# EAGLE board eib-256_panel (EAGLE 6.5.0), part 1 of 18
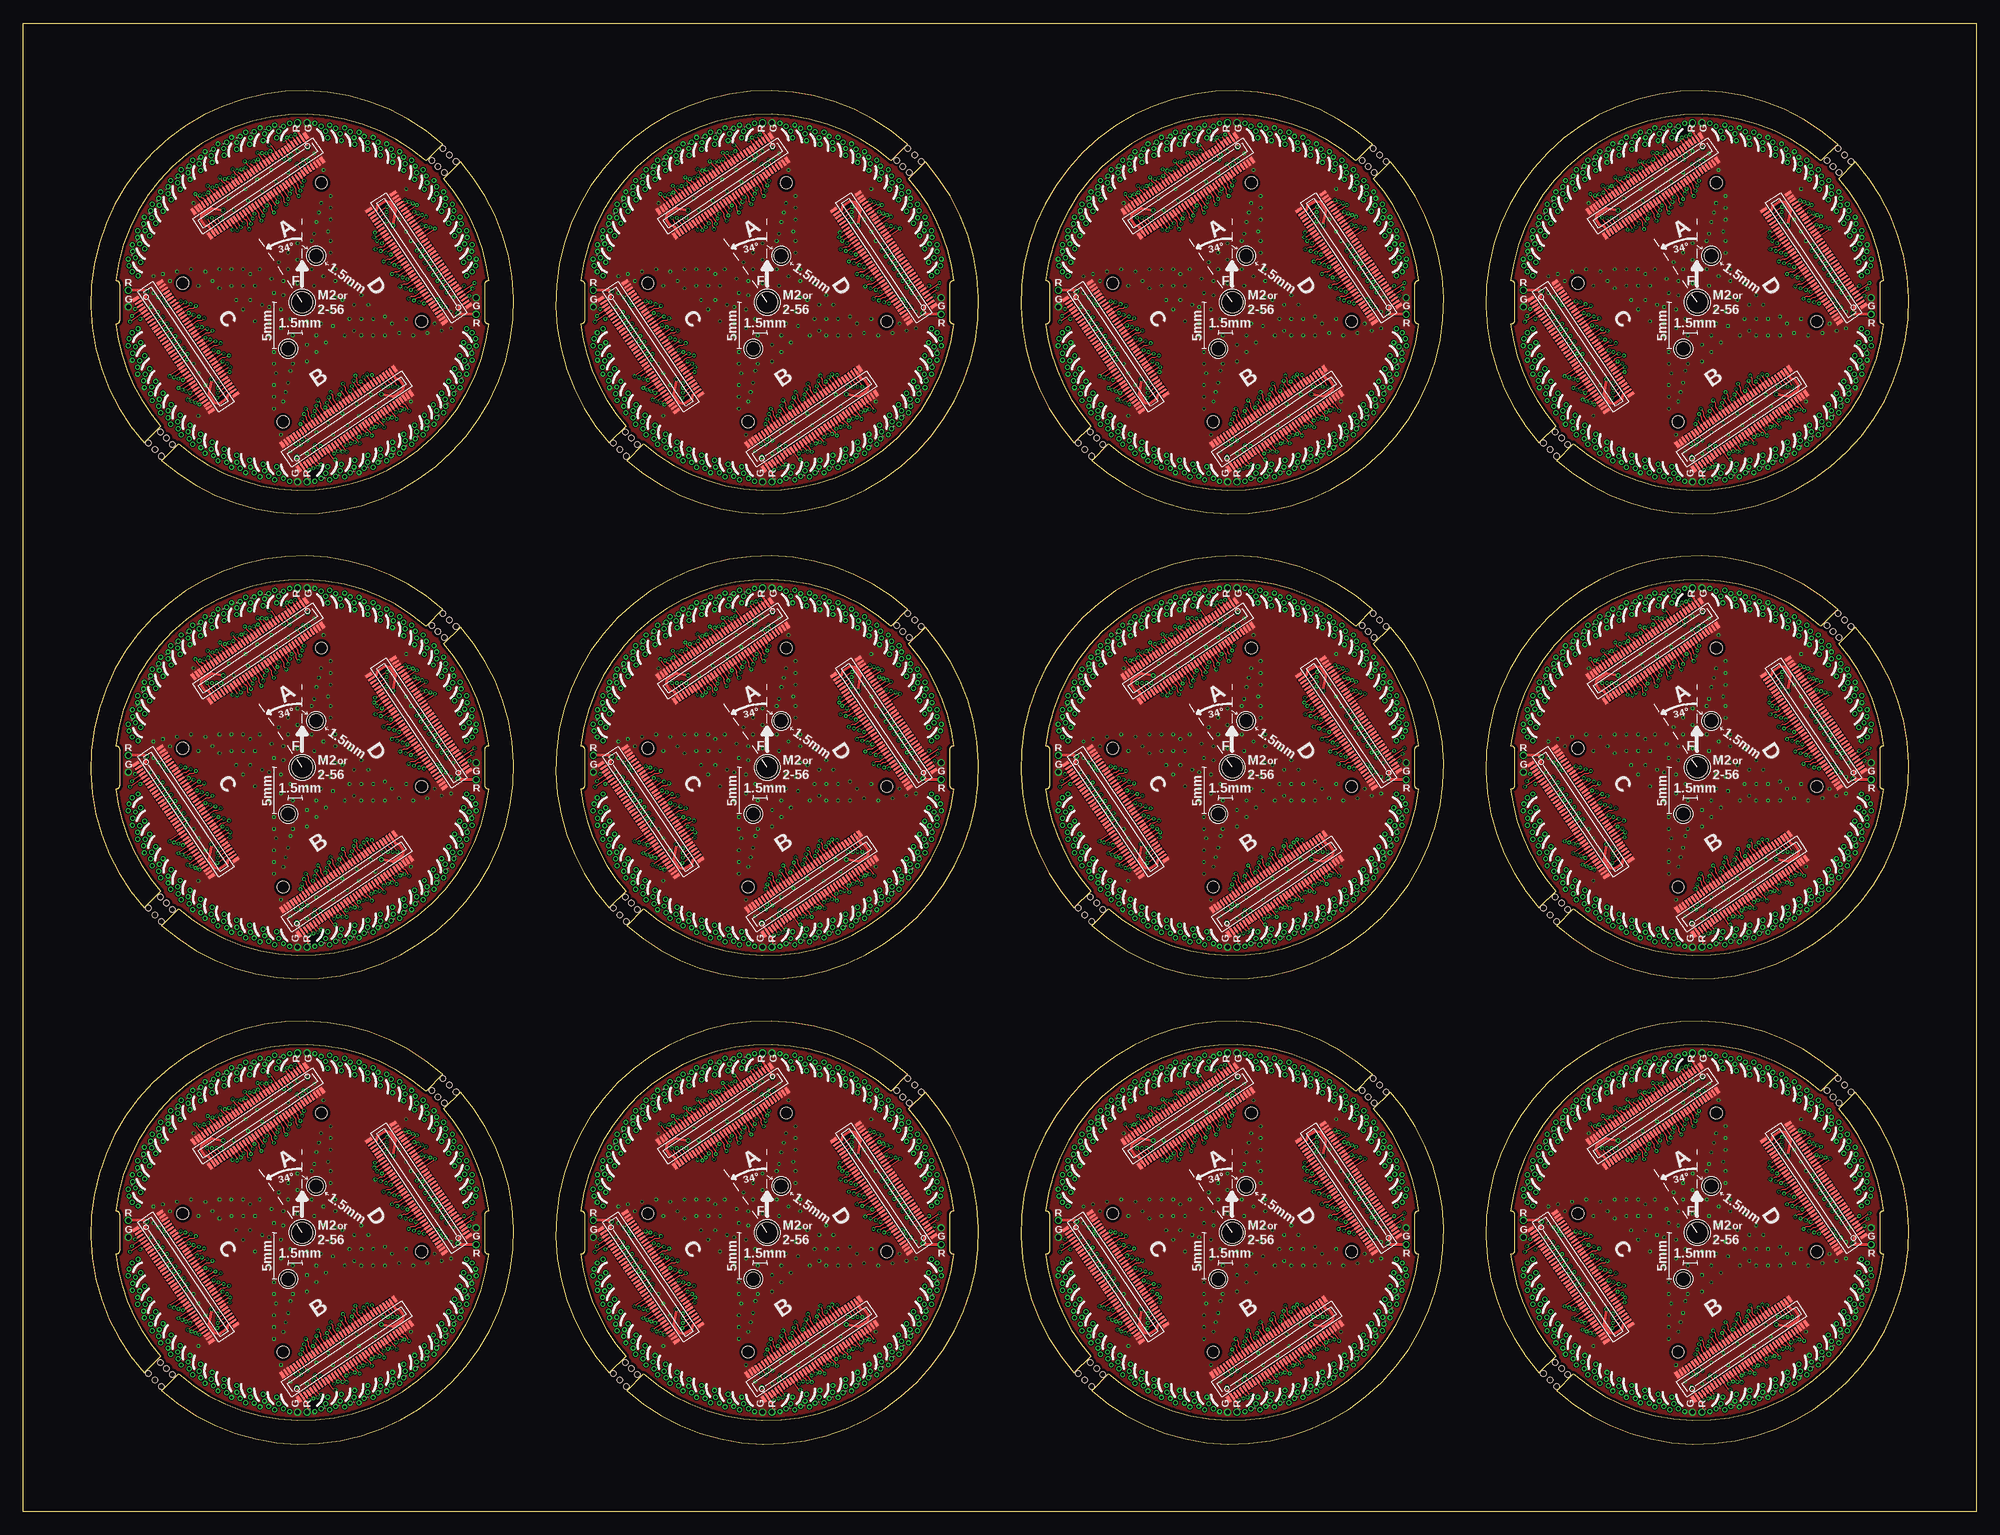
[diagram p0: board, top side]
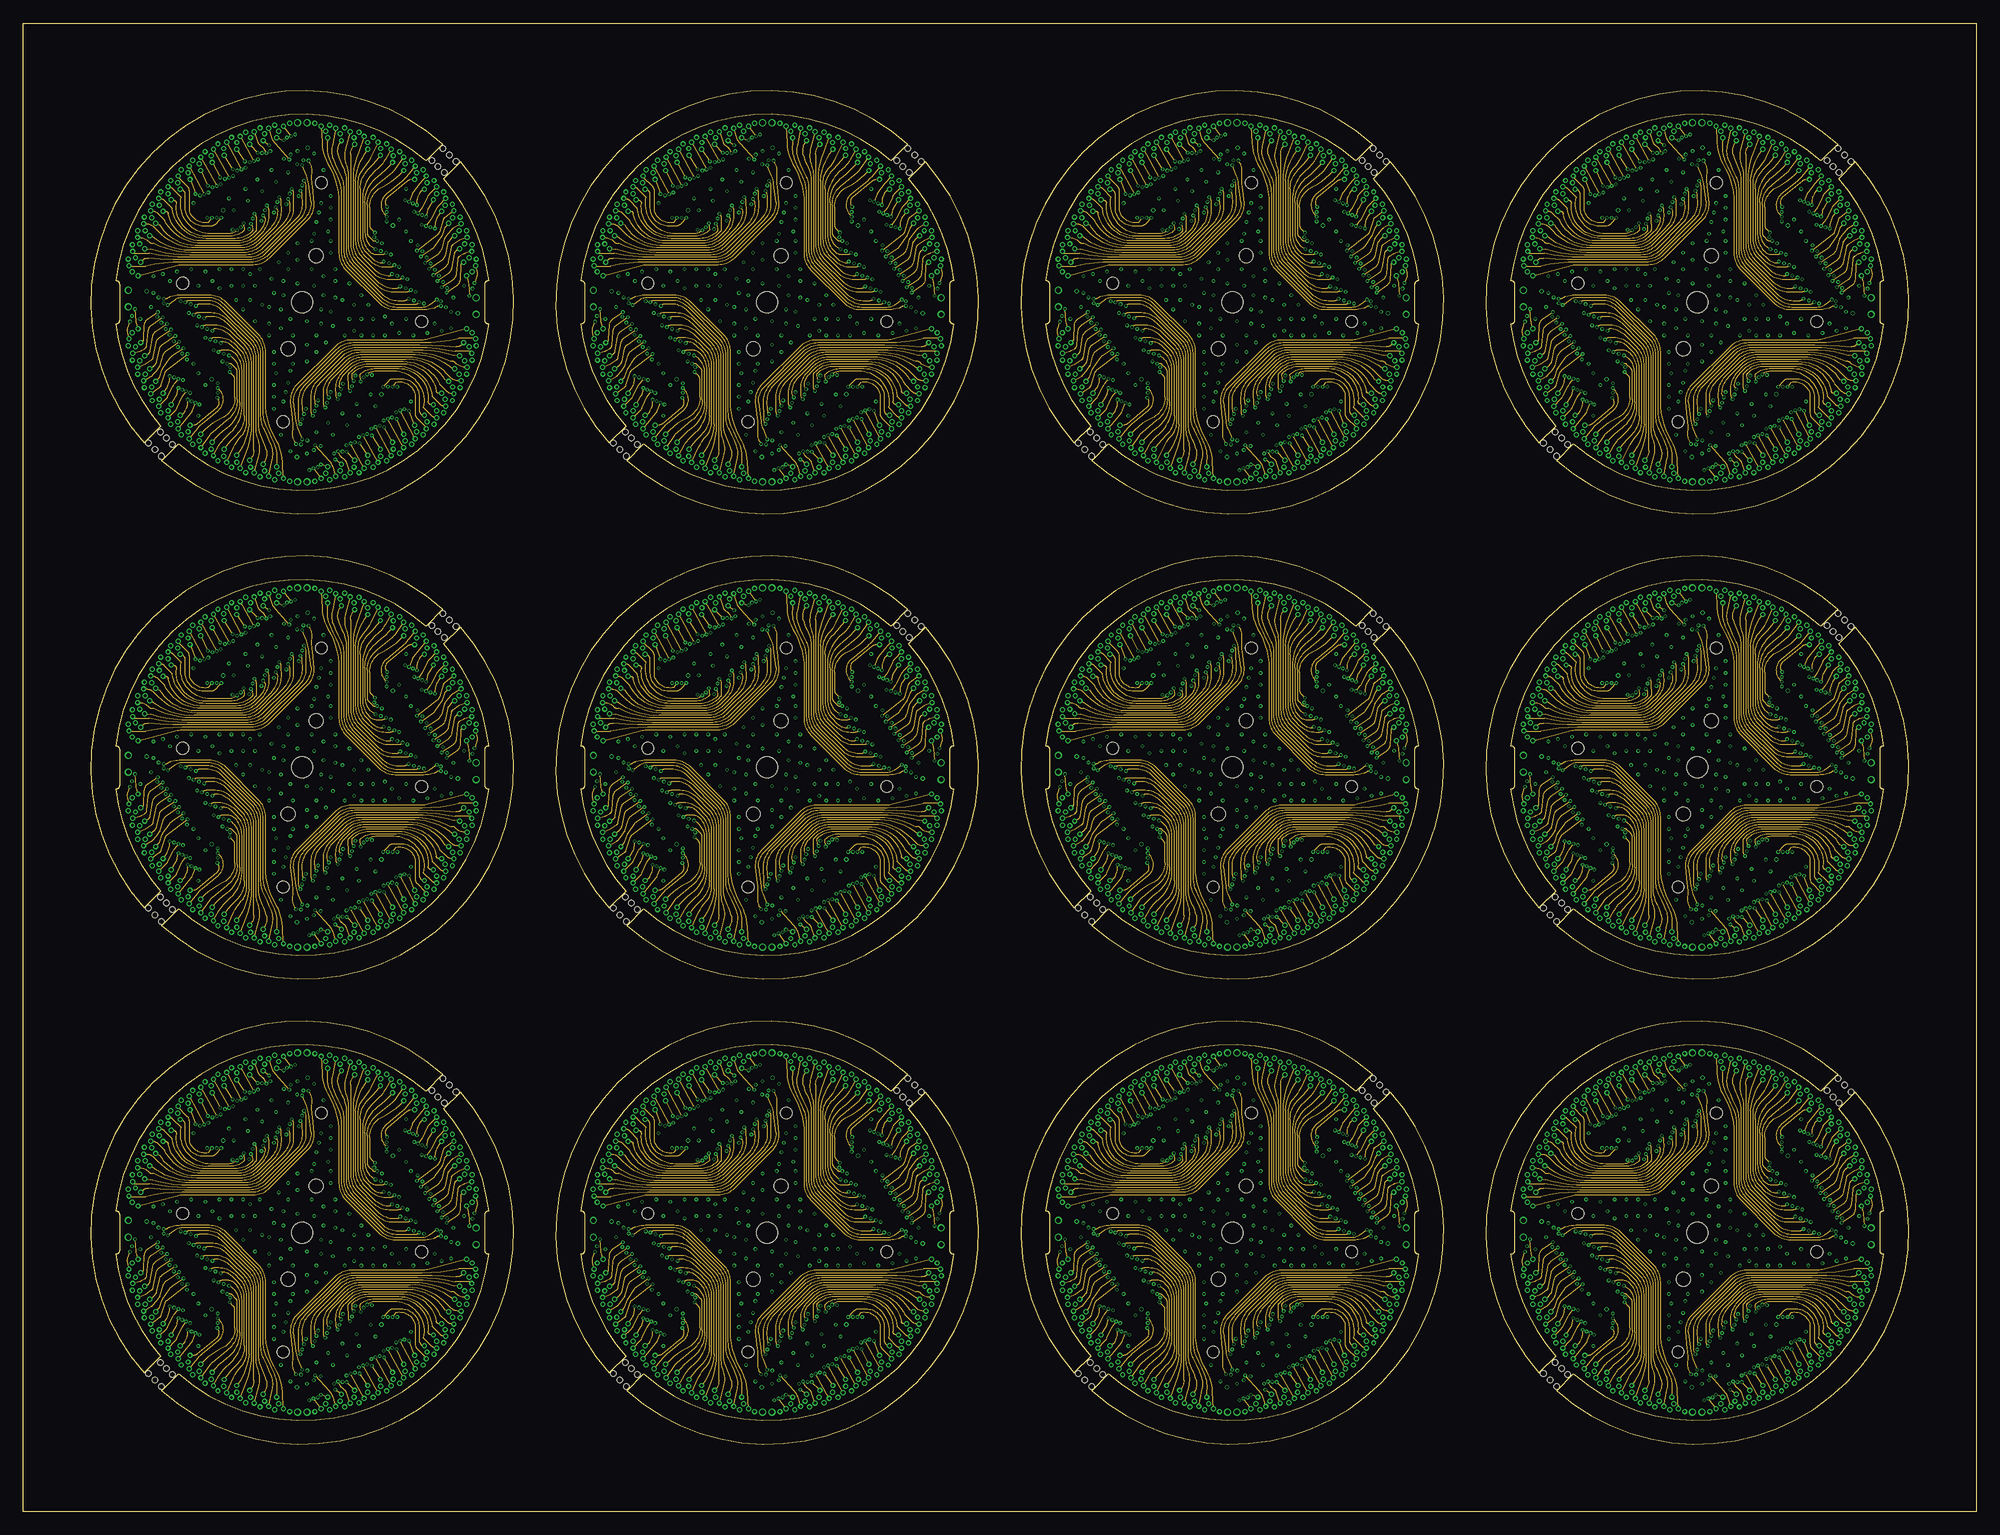
[diagram p1: board, inner layer Route2]
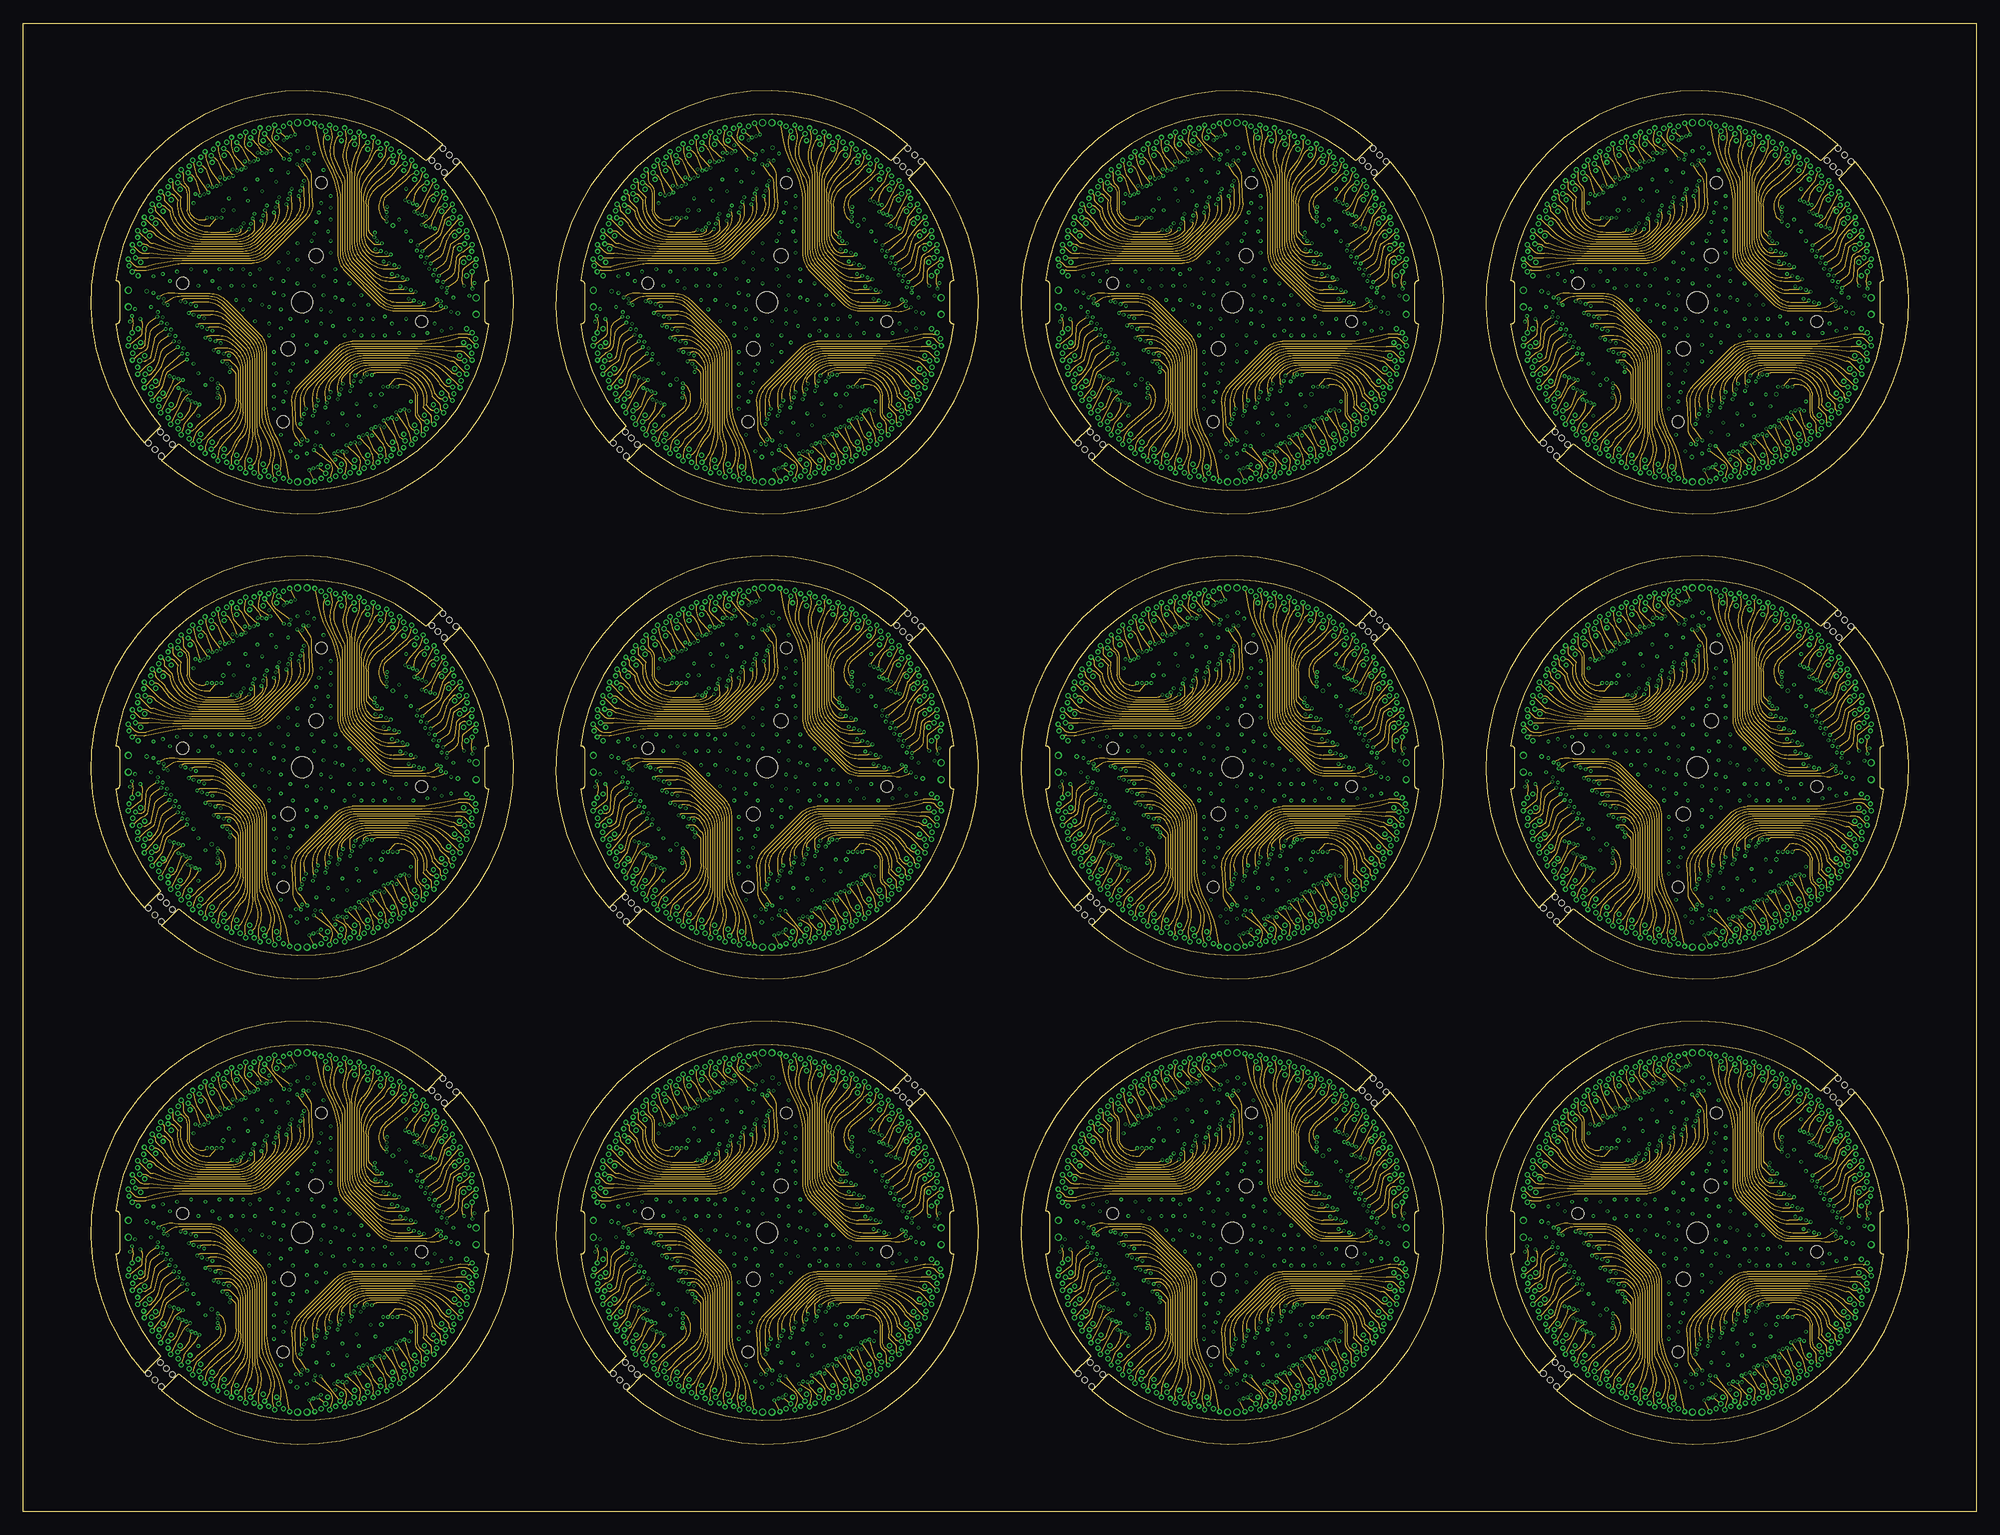
[diagram p2: board, inner layer Route15]
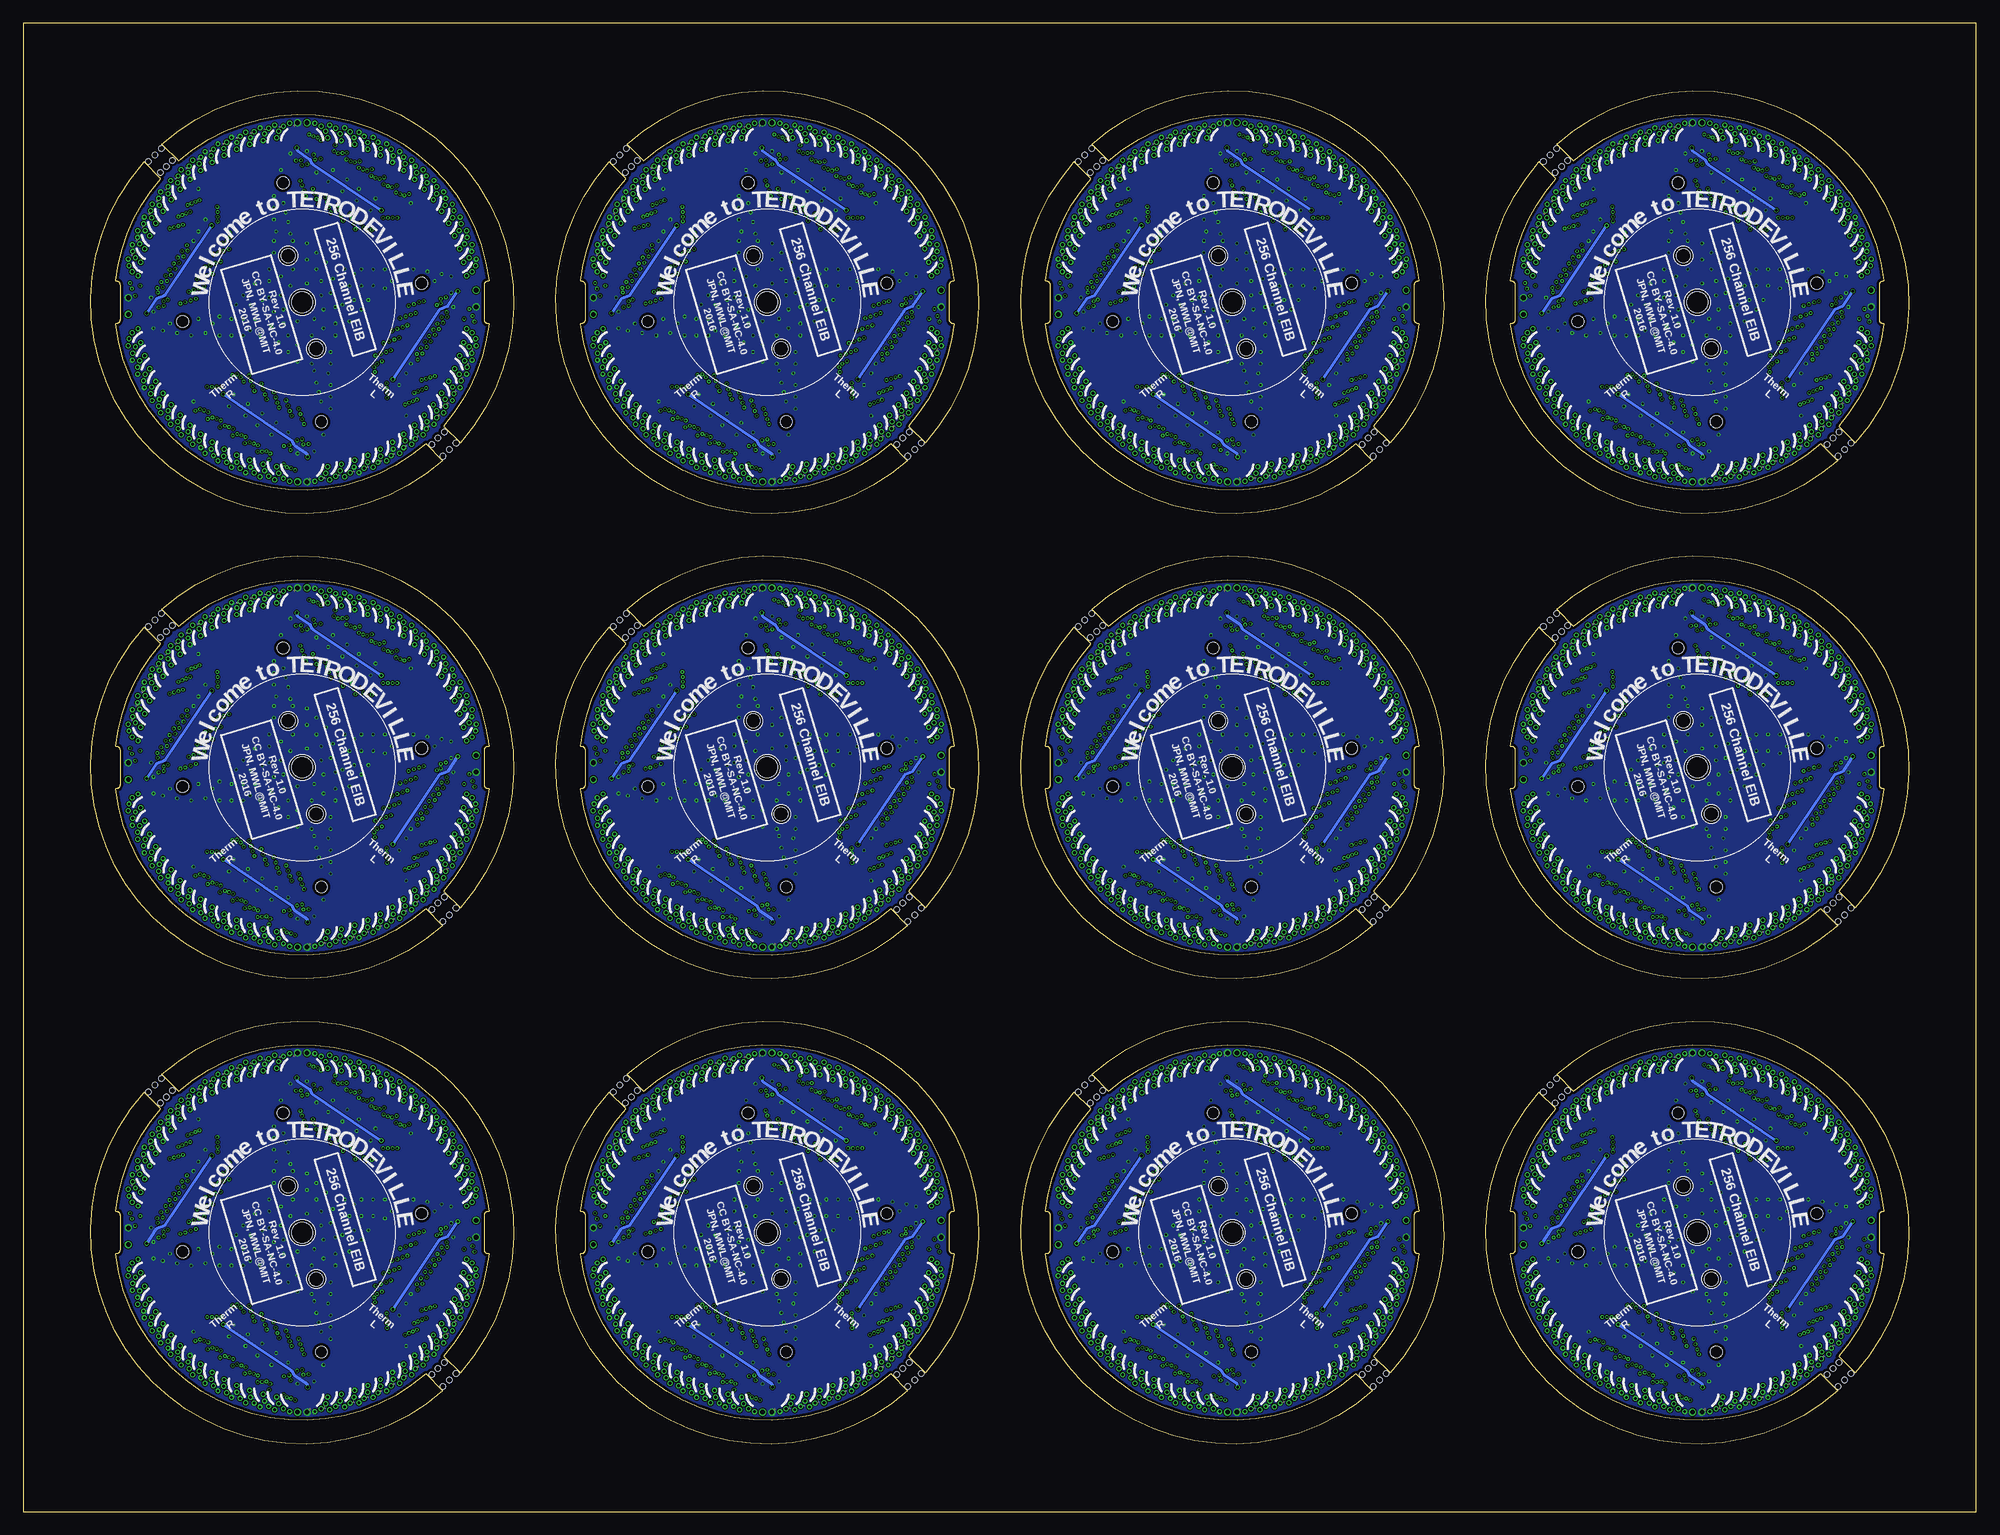
[diagram p3: board, bottom side, seen from below]

Size 210 x 160 mm. Coordinates in mm from the lower left corner, seen from the top.
Outline: 45.1,47.01 arc173 12.99,14.9
Outline: 45.1,47.01 arc173 12.99,14.9
Outline: 12.99,14.9 14.8,16.7 arc-35 9.93,27.7 10,27.7 arc90 10.4,28.1 10.4,31.9 arc90 10,32.3 9.93,32.3 arc-125 43.3,45.2 45.1,47.01
Outline: 95.1,47.01 arc173 62.99,14.9
Outline: 95.1,47.01 arc173 62.99,14.9
Outline: 62.99,14.9 64.8,16.7 arc-35 59.93,27.7 60,27.7 arc90 60.4,28.1 60.4,31.9 arc90 60,32.3 59.93,32.3 arc-125 93.3,45.2 95.1,47.01
Outline: 145.1,47.01 arc173 112.99,14.9
Outline: 145.1,47.01 arc173 112.99,14.9
Outline: 112.99,14.9 114.8,16.7 arc-35 109.93,27.7 110,27.7 arc90 110.4,28.1 110.4,31.9 arc90 110,32.3 109.93,32.3 arc-125 143.3,45.2 145.1,47.01
Outline: 195.1,47.01 arc173 162.99,14.9
Outline: 195.1,47.01 arc173 162.99,14.9
Outline: 162.99,14.9 164.8,16.7 arc-35 159.93,27.7 160,27.7 arc90 160.4,28.1 160.4,31.9 arc90 160,32.3 159.93,32.3 arc-125 193.3,45.2 195.1,47.01
Outline: 45.1,97.01 arc173 12.99,64.9
Outline: 45.1,97.01 arc173 12.99,64.9
Outline: 12.99,64.9 14.8,66.7 arc-35 9.93,77.7 10,77.7 arc90 10.4,78.1 10.4,81.9 arc90 10,82.3 9.93,82.3 arc-125 43.3,95.2 45.1,97.01
Outline: 95.1,97.01 arc173 62.99,64.9
Outline: 95.1,97.01 arc173 62.99,64.9
Outline: 62.99,64.9 64.8,66.7 arc-35 59.93,77.7 60,77.7 arc90 60.4,78.1 60.4,81.9 arc90 60,82.3 59.93,82.3 arc-125 93.3,95.2 95.1,97.01
Outline: 145.1,97.01 arc173 112.99,64.9
Outline: 145.1,97.01 arc173 112.99,64.9
Outline: 112.99,64.9 114.8,66.7 arc-35 109.93,77.7 110,77.7 arc90 110.4,78.1 110.4,81.9 arc90 110,82.3 109.93,82.3 arc-125 143.3,95.2 145.1,97.01
Outline: 195.1,97.01 arc173 162.99,64.9
Outline: 195.1,97.01 arc173 162.99,64.9
Outline: 162.99,64.9 164.8,66.7 arc-35 159.93,77.7 160,77.7 arc90 160.4,78.1 160.4,81.9 arc90 160,82.3 159.93,82.3 arc-125 193.3,95.2 195.1,97.01
Outline: 45.1,147.01 arc173 12.99,114.9
Outline: 45.1,147.01 arc173 12.99,114.9
Outline: 12.99,114.9 14.8,116.7 arc-35 9.93,127.7 10,127.7 arc90 10.4,128.1 10.4,131.9 arc90 10,132.3 9.93,132.3 arc-125 43.3,145.2 45.1,147.01
Outline: 95.1,147.01 arc173 62.99,114.9
Outline: 95.1,147.01 arc173 62.99,114.9
Outline: 62.99,114.9 64.8,116.7 arc-35 59.93,127.7 60,127.7 arc90 60.4,128.1 60.4,131.9 arc90 60,132.3 59.93,132.3 arc-125 93.3,145.2 95.1,147.01
Outline: 145.1,147.01 arc173 112.99,114.9
Outline: 145.1,147.01 arc173 112.99,114.9
Outline: 112.99,114.9 114.8,116.7 arc-35 109.93,127.7 110,127.7 arc90 110.4,128.1 110.4,131.9 arc90 110,132.3 109.93,132.3 arc-125 143.3,145.2 145.1,147.01
Outline: 195.1,147.01 arc173 162.99,114.9
Outline: 195.1,147.01 arc173 162.99,114.9
Outline: 162.99,114.9 164.8,116.7 arc-35 159.93,127.7 160,127.7 arc90 160.4,128.1 160.4,131.9 arc90 160,132.3 159.93,132.3 arc-125 193.3,145.2 195.1,147.01
Outline: 14.9,12.99 arc173 47.01,45.1 45.2,43.3 arc-35 50.07,32.3 50,32.3 arc90 49.6,31.9 49.6,28.1 arc90 50,27.7 50.07,27.7 arc-125 16.7,14.8 14.9,12.99
Outline: 64.9,12.99 arc173 97.01,45.1 95.2,43.3 arc-35 100.07,32.3 100,32.3 arc90 99.6,31.9 99.6,28.1 arc90 100,27.7 100.07,27.7 arc-125 66.7,14.8 64.9,12.99
Outline: 114.9,12.99 arc173 147.01,45.1 145.2,43.3 arc-35 150.07,32.3 150,32.3 arc90 149.6,31.9 149.6,28.1 arc90 150,27.7 150.07,27.7 arc-125 116.7,14.8 114.9,12.99
Outline: 164.9,12.99 arc173 197.01,45.1 195.2,43.3 arc-35 200.07,32.3 200,32.3 arc90 199.6,31.9 199.6,28.1 arc90 200,27.7 200.07,27.7 arc-125 166.7,14.8 164.9,12.99
Outline: 14.9,62.99 arc173 47.01,95.1 45.2,93.3 arc-35 50.07,82.3 50,82.3 arc90 49.6,81.9 49.6,78.1 arc90 50,77.7 50.07,77.7 arc-125 16.7,64.8 14.9,62.99
Outline: 64.9,62.99 arc173 97.01,95.1 95.2,93.3 arc-35 100.07,82.3 100,82.3 arc90 99.6,81.9 99.6,78.1 arc90 100,77.7 100.07,77.7 arc-125 66.7,64.8 64.9,62.99
Outline: 114.9,62.99 arc173 147.01,95.1 145.2,93.3 arc-35 150.07,82.3 150,82.3 arc90 149.6,81.9 149.6,78.1 arc90 150,77.7 150.07,77.7 arc-125 116.7,64.8 114.9,62.99
Outline: 164.9,62.99 arc173 197.01,95.1 195.2,93.3 arc-35 200.07,82.3 200,82.3 arc90 199.6,81.9 199.6,78.1 arc90 200,77.7 200.07,77.7 arc-125 166.7,64.8 164.9,62.99
Outline: 14.9,112.99 arc173 47.01,145.1 45.2,143.3 arc-35 50.07,132.3 50,132.3 arc90 49.6,131.9 49.6,128.1 arc90 50,127.7 50.07,127.7 arc-125 16.7,114.8 14.9,112.99
Outline: 64.9,112.99 arc173 97.01,145.1 95.2,143.3 arc-35 100.07,132.3 100,132.3 arc90 99.6,131.9 99.6,128.1 arc90 100,127.7 100.07,127.7 arc-125 66.7,114.8 64.9,112.99
Outline: 114.9,112.99 arc173 147.01,145.1 145.2,143.3 arc-35 150.07,132.3 150,132.3 arc90 149.6,131.9 149.6,128.1 arc90 150,127.7 150.07,127.7 arc-125 116.7,114.8 114.9,112.99
Outline: 164.9,112.99 arc173 197.01,145.1 195.2,143.3 arc-35 200.07,132.3 200,132.3 arc90 199.6,131.9 199.6,128.1 arc90 200,127.7 200.07,127.7 arc-125 166.7,114.8 164.9,112.99
Outline: 0,0 0,160 210,160 210,0 0,0
Copper layers (1+2*15+16): Top 0.035mm / dielectric 1.5mm / Route2 0.035mm / dielectric 0.15mm / Route15 0.035mm / dielectric 0.2mm / Bottom 0.035mm
Design rules "pcb-cart-standard-4-layer": minimum track width 3mil, minimum drill 6mil, track to track 4mil, track to pad 4mil, pad to pad 4mil, via to via 4mil, smd to smd 4mil, copper to edge 12mil, drill to drill 6mil, minimum pad ring 3mil, minimum via ring 3mil, stop-mask expansion 2mil, vias tented up to drill 20mil, thermal gap 10mil
Net classes: 1 thick: width 0.102 mm
Holes 0.6 mm at 14.87,13.45 14.16,14.16 13.45,14.87 16.05,14.74 15.41,15.41 14.74,16.05 45.13,46.55 45.84,45.84 46.55,45.13 43.95,45.26 44.59,44.59 45.26,43.95 64.87,13.45 64.16,14.16 63.45,14.87 66.05,14.74 65.41,15.41 64.74,16.05 95.13,46.55 95.84,45.84 96.55,45.13 93.95,45.26 94.59,44.59 95.26,43.95 114.87,13.45 114.16,14.16 113.45,14.87 116.05,14.74 115.41,15.41 114.74,16.05 145.13,46.55 145.84,45.84 146.55,45.13 143.95,45.26 144.59,44.59 145.26,43.95 164.87,13.45 164.16,14.16 163.45,14.87 166.05,14.74 165.41,15.41 164.74,16.05 195.13,46.55 195.84,45.84 196.55,45.13 193.95,45.26 194.59,44.59 195.26,43.95 14.87,63.45 14.16,64.16 13.45,64.87 16.05,64.74 15.41,65.41 14.74,66.05 45.13,96.55 45.84,95.84 46.55,95.13 43.95,95.26 44.59,94.59 45.26,93.95 64.87,63.45 64.16,64.16 63.45,64.87 66.05,64.74 65.41,65.41 64.74,66.05 95.13,96.55 95.84,95.84 96.55,95.13 93.95,95.26 94.59,94.59 95.26,93.95 114.87,63.45 114.16,64.16 113.45,64.87 116.05,64.74 115.41,65.41 114.74,66.05 145.13,96.55 145.84,95.84 146.55,95.13 143.95,95.26 144.59,94.59 145.26,93.95 164.87,63.45 164.16,64.16 163.45,64.87 166.05,64.74 165.41,65.41 164.74,66.05 195.13,96.55 195.84,95.84 196.55,95.13 193.95,95.26 194.59,94.59 195.26,93.95 14.87,113.45 14.16,114.16 13.45,114.87 16.05,114.74 15.41,115.41 14.74,116.05 45.13,146.55 45.84,145.84 46.55,145.13 43.95,145.26 44.59,144.59 45.26,143.95 64.87,113.45 64.16,114.16 63.45,114.87 66.05,114.74 65.41,115.41 64.74,116.05 95.13,146.55 95.84,145.84 96.55,145.13 93.95,145.26 94.59,144.59 95.26,143.95 114.87,113.45 114.16,114.16 113.45,114.87 116.05,114.74 115.41,115.41 114.74,116.05 145.13,146.55 145.84,145.84 146.55,145.13 143.95,145.26 144.59,144.59 145.26,143.95 164.87,113.45 164.16,114.16 163.45,114.87 166.05,114.74 165.41,115.41 164.74,116.05 195.13,146.55 195.84,145.84 196.55,145.13 193.95,145.26 194.59,144.59 195.26,143.95
Holes 1.27 mm at 32.06,42.85 42.85,27.94 27.94,17.15 17.15,32.06 82.06,42.85 92.85,27.94 77.94,17.15 67.15,32.06 132.06,42.85 142.85,27.94 127.94,17.15 117.15,32.06 182.06,42.85 192.85,27.94 177.94,17.15 167.15,32.06 32.06,92.85 42.85,77.94 27.94,67.15 17.15,82.06 82.06,92.85 92.85,77.94 77.94,67.15 67.15,82.06 132.06,92.85 142.85,77.94 127.94,67.15 117.15,82.06 182.06,92.85 192.85,77.94 177.94,67.15 167.15,82.06 32.06,142.85 42.85,127.94 27.94,117.15 17.15,132.06 82.06,142.85 92.85,127.94 77.94,117.15 67.15,132.06 132.06,142.85 142.85,127.94 127.94,117.15 117.15,132.06 182.06,142.85 192.85,127.94 177.94,117.15 167.15,132.06

## Footprints (pad centres in the part's own frame; a part is rotated, then mirrored left to right if it is on the bottom)
DF40-70HEAD = smd 0.23 x 0.75: 1 -6.8,-1.585; 2 -6.4,-1.585; 3 -6,-1.585; 4 -5.6,-1.585; 5 -5.2,-1.585; 6 -4.8,-1.585; 7 -4.4,-1.585; 8 -4,-1.585; 9 -3.6,-1.585; 10 -3.2,-1.585; 11 -2.8,-1.585; 12 -2.4,-1.585; 13 -2,-1.585; 14 -1.6,-1.585; 15 -1.2,-1.585; 16 -0.8,-1.585; 17 -0.4,-1.585; 18 0,-1.585; 19 0.4,-1.585; 20 0.8,-1.585; 21 1.2,-1.585; 22 1.6,-1.585; 23 2,-1.585; 24 2.4,-1.585; 25 2.8,-1.585; 26 3.2,-1.585; 27 3.6,-1.585; 28 4,-1.585; 29 4.4,-1.585; 30 4.8,-1.585; 31 5.2,-1.585; 32 5.6,-1.585; 33 6,-1.585; 34 6.4,-1.585; 35 6.8,-1.585; 36 6.8,1.585; 37 6.4,1.585; 38 6,1.585; 39 5.6,1.585; 40 5.2,1.585; 41 4.8,1.585; 42 4.4,1.585; 43 4,1.585; 44 3.6,1.585; 45 3.2,1.585; 46 2.8,1.585; 47 2.4,1.585; 48 2,1.585; 49 1.6,1.585; 50 1.2,1.585; 51 0.8,1.585; 52 0.4,1.585; 53 0,1.585; 54 -0.4,1.585; 55 -0.8,1.585; 56 -1.2,1.585; 57 -1.6,1.585; 58 -2,1.585; 59 -2.4,1.585; 60 -2.8,1.585; 61 -3.2,1.585; 62 -3.6,1.585; 63 -4,1.585; 64 -4.4,1.585; 65 -4.8,1.585; 66 -5.2,1.585; 67 -5.6,1.585; 68 -6,1.585; 69 -6.4,1.585; 70 -6.8,1.585 | smd 0.35 x 0.75: M1 -7.275,-1.585; M2 7.275,-1.585; M3 7.275,1.585; M4 -7.275,1.585
GOLDPIN_0.5ID_0.7OD = drill 0.5 pad 0.7: P$1 0,0
TETRODE_0.3ID_LINEAR = drill 0.305 pad 0.533: 0 2,17.78; 1 1.76,18.48; 2 1.23,19; 3 0.55,19.28
EIB_MOUNT_A = hole 2.261: 0,0 | hole 1.5: 1.5,5; -1.5,-5